# EAGLE board pocketbone (EAGLE 7.4.0)
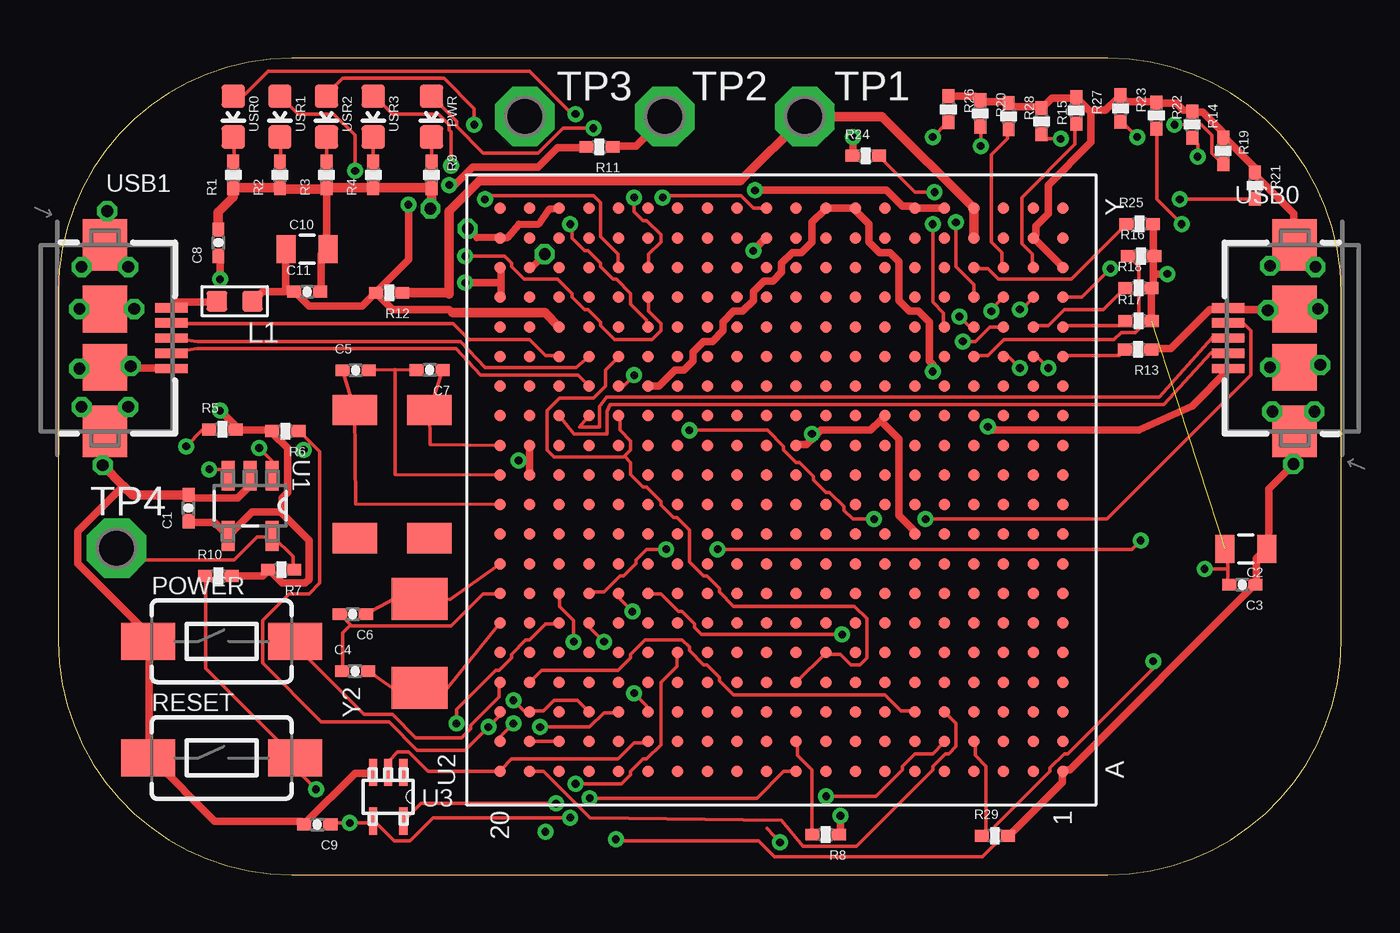
[diagram p0: board, top side]
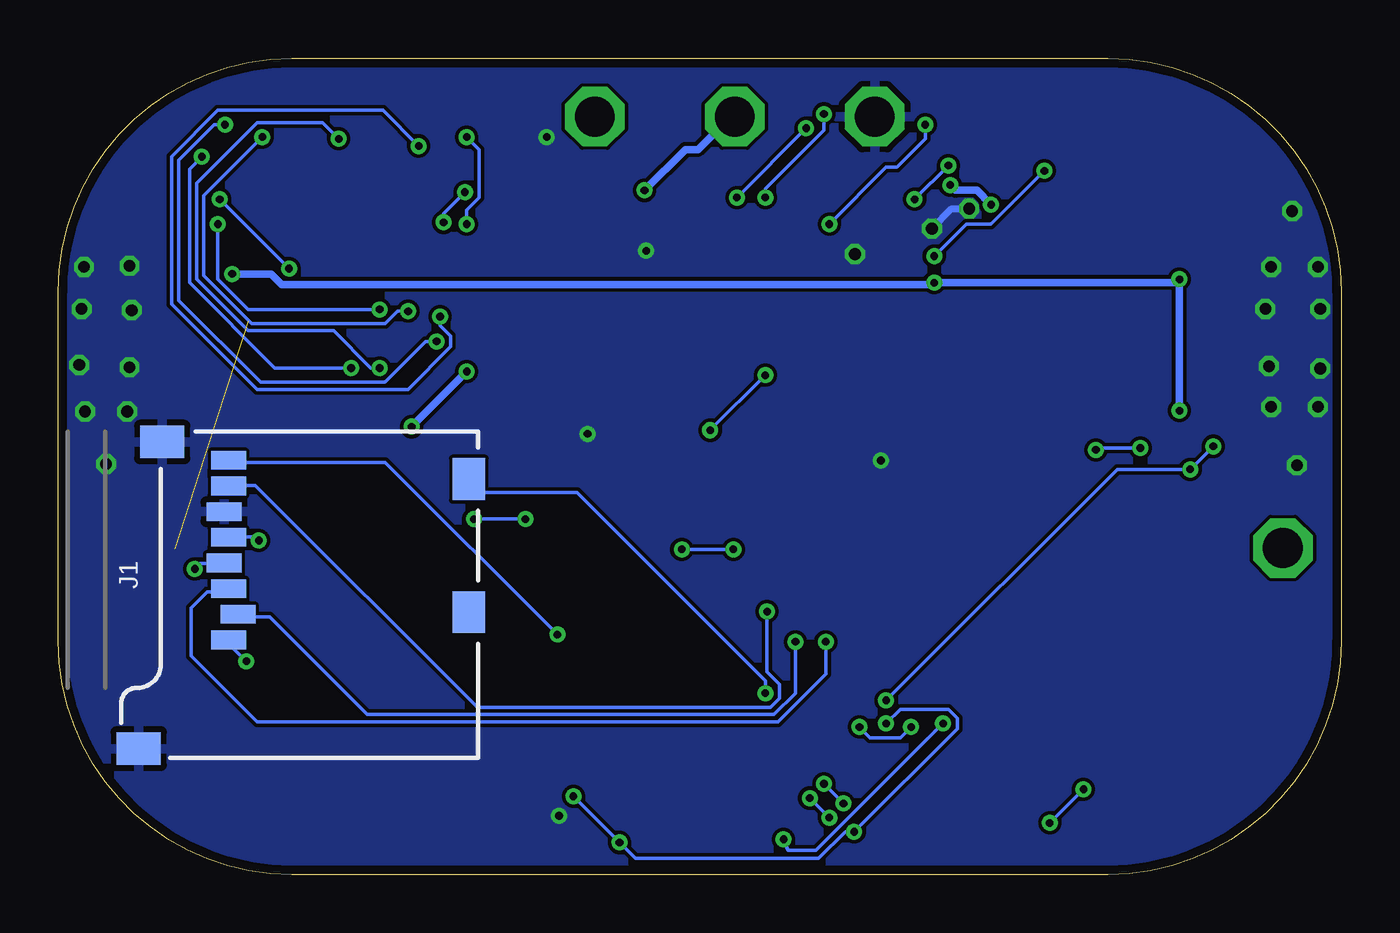
[diagram p1: board, bottom side, seen from below]

Size 55 x 35 mm. Coordinates in mm from the lower left corner, seen from the top.
Outline: 45,35 10,35 arc90 0,25 0,10 arc90 10,0 45,0 arc90 55,10 55,25 arc90 45,35
Copper layers (1*16): Top 0.0356mm / dielectric 1.5011mm / Bottom 0.0356mm
Design rules "default": minimum track width 6mil, minimum drill 13mil, track to track 6mil, track to pad 6mil, pad to pad 6mil, via to via 6mil, smd to smd 6mil, copper to edge 15mil, drill to drill 6mil, minimum pad ring 7mil, minimum via ring 7mil, stop-mask expansion 3mil, vias tented up to drill 15mil, thermal gap 10mil
Net classes: 0 default: width 0.152 mm, drill 0.33 mm, clearance 0.152 mm; 1 ground: width 0.33 mm, drill 0.33 mm, clearance 0.152 mm; 2 usb: width 0.152 mm, clearance 0.152 mm; 3 power: width 0.33 mm, drill 0.33 mm, clearance 0.152 mm

## Footprints (pad centres in the part's own frame; a part is rotated, then mirrored left to right if it is on the bottom)
0402-CAP = smd 0.61 x 0.508: 1 -0.559,0; 2 0.559,0
0805 = smd 0.8 x 1.2: 1 -0.9,0; 2 0.9,0
MICRO-SD-SOCKET-PP = smd 1.8 x 1.4: CD1 -2.05,0.4; CD2 -7.75,0.4 | smd 0.8 x 1.5: CD/DAT3 -7.84,10.3; CLK -4.54,10.7; CMD -6.74,10.7; DAT0 -2.34,10.7; DAT1 -1.24,10.7; DAT2 -8.94,10.7; GND -3.44,10.9; VCC -5.64,10.9 | smd 1.4 x 1.9: GND1 -13.6,14.55; GND3 -0.45,13.55
L0603 = smd 0.889 x 0.889: 1 -0.762,0; 2 0.762,0
TACTILE-SWITCH-1101NE = smd 2.3 x 1.6: 1 -3.15,0; 2 3.15,0
LED-0603 = smd 1 x 1: A 0,-0.877; C 0,0.877
0402-RES = smd 0.61 x 0.508: 1 -0.559,0; 2 0.559,0
P1-17 = drill 1.702 pad 2.54 octagon: TP 0,0
SOT95P290X145-5N = smd 1.27 x 0.559: 1 -1.295,0.94; 2 -1.295,0; 3 -1.295,-0.94; 4 1.295,-0.94; 5 1.295,0.94
OSD3358 = smd 0.5 x 0.5: A1 -12.065,-12.065; A2 -12.065,-10.795; A3 -12.065,-9.525; A4 -12.065,-8.255; A5 -12.065,-6.985; A6 -12.065,-5.715; A7 -12.065,-4.445; A8 -12.065,-3.175; A9 -12.065,-1.905; A10 -12.065,-0.635; A11 -12.065,0.635; A12 -12.065,1.905; A13 -12.065,3.175; A14 -12.065,4.445; A15 -12.065,5.715; A16 -12.065,6.985; A17 -12.065,8.255; A18 -12.065,9.525; A19 -12.065,10.795; A20 -12.065,12.065; B1 -10.795,-12.065; B2 -10.795,-10.795; B3 -10.795,-9.525; B4 -10.795,-8.255; B5 -10.795,-6.985; B6 -10.795,-5.715; B7 -10.795,-4.445; B8 -10.795,-3.175; B9 -10.795,-1.905; B10 -10.795,-0.635; B11 -10.795,0.635; B12 -10.795,1.905; B13 -10.795,3.175; B14 -10.795,4.445; B15 -10.795,5.715; B16 -10.795,6.985; B17 -10.795,8.255; B18 -10.795,9.525; B19 -10.795,10.795; B20 -10.795,12.065; C1 -9.525,-12.065; C2 -9.525,-10.795; C3 -9.525,-9.525; C4 -9.525,-8.255; C5 -9.525,-6.985; C6 -9.525,-5.715; C7 -9.525,-4.445; C8 -9.525,-3.175; C9 -9.525,-1.905; C10 -9.525,-0.635; C11 -9.525,0.635; C12 -9.525,1.905; C13 -9.525,3.175; C14 -9.525,4.445; C15 -9.525,5.715; C16 -9.525,6.985; C17 -9.525,8.255; C18 -9.525,9.525; C19 -9.525,10.795; C20 -9.525,12.065; D1 -8.255,-12.065; D2 -8.255,-10.795; D3 -8.255,-9.525; D4 -8.255,-8.255; D5 -8.255,-6.985; D6 -8.255,-5.715; D7 -8.255,-4.445; D8 -8.255,-3.175; D9 -8.255,-1.905; D10 -8.255,-0.635; D11 -8.255,0.635; D12 -8.255,1.905; D13 -8.255,3.175; D14 -8.255,4.445; D15 -8.255,5.715; D16 -8.255,6.985; D17 -8.255,8.255; D18 -8.255,9.525; D19 -8.255,10.795; D20 -8.255,12.065; E1 -6.985,-12.065; E2 -6.985,-10.795; E3 -6.985,-9.525; E4 -6.985,-8.255; E5 -6.985,-6.985; E6 -6.985,-5.715; E7 -6.985,-4.445; E8 -6.985,-3.175; E9 -6.985,-1.905; E10 -6.985,-0.635; E11 -6.985,0.635; E12 -6.985,1.905; E13 -6.985,3.175; E14 -6.985,4.445; E15 -6.985,5.715; E16 -6.985,6.985; E17 -6.985,8.255; E18 -6.985,9.525; E19 -6.985,10.795; E20 -6.985,12.065; F1 -5.715,-12.065; F2 -5.715,-10.795; F3 -5.715,-9.525; F4 -5.715,-8.255; F5 -5.715,-6.985; F6 -5.715,-5.715; F7 -5.715,-4.445; F8 -5.715,-3.175; F9 -5.715,-1.905; F10 -5.715,-0.635; F11 -5.715,0.635; F12 -5.715,1.905; F13 -5.715,3.175; F14 -5.715,4.445; F15 -5.715,5.715; F16 -5.715,6.985; F17 -5.715,8.255; F18 -5.715,9.525; F19 -5.715,10.795; F20 -5.715,12.065; G1 -4.445,-12.065; G2 -4.445,-10.795; G3 -4.445,-9.525; G4 -4.445,-8.255; G5 -4.445,-6.985; G6 -4.445,-5.715; G7 -4.445,-4.445; G8 -4.445,-3.175; G9 -4.445,-1.905; G10 -4.445,-0.635; G11 -4.445,0.635; G12 -4.445,1.905; G13 -4.445,3.175; G14 -4.445,4.445; G15 -4.445,5.715; G16 -4.445,6.985; G17 -4.445,8.255; G18 -4.445,9.525; G19 -4.445,10.795; G20 -4.445,12.065; H1 -3.175,-12.065; H2 -3.175,-10.795; H3 -3.175,-9.525; H4 -3.175,-8.255; H5 -3.175,-6.985; H6 -3.175,-5.715; H7 -3.175,-4.445; H8 -3.175,-3.175; H9 -3.175,-1.905; H10 -3.175,-0.635; H11 -3.175,0.635; H12 -3.175,1.905; H13 -3.175,3.175; H14 -3.175,4.445; H15 -3.175,5.715; H16 -3.175,6.985; H17 -3.175,8.255; H18 -3.175,9.525; H19 -3.175,10.795; H20 -3.175,12.065; J1 -1.905,-12.065; J2 -1.905,-10.795; J3 -1.905,-9.525; J4 -1.905,-8.255; J5 -1.905,-6.985; J6 -1.905,-5.715; J7 -1.905,-4.445; J8 -1.905,-3.175; J9 -1.905,-1.905; J10 -1.905,-0.635; J11 -1.905,0.635; J12 -1.905,1.905; J13 -1.905,3.175; J14 -1.905,4.445; J15 -1.905,5.715; J16 -1.905,6.985; J17 -1.905,8.255; J18 -1.905,9.525; J19 -1.905,10.795; J20 -1.905,12.065; K1 -0.635,-12.065; K2 -0.635,-10.795; K3 -0.635,-9.525; K4 -0.635,-8.255; K5 -0.635,-6.985; K6 -0.635,-5.715; K7 -0.635,-4.445; K8 -0.635,-3.175; K9 -0.635,-1.905; K10 -0.635,-0.635; K11 -0.635,0.635; K12 -0.635,1.905; K13 -0.635,3.175; K14 -0.635,4.445; K15 -0.635,5.715; K16 -0.635,6.985; K17 -0.635,8.255; K18 -0.635,9.525; K19 -0.635,10.795; K20 -0.635,12.065; L1 0.635,-12.065; L2 0.635,-10.795; L3 0.635,-9.525; L4 0.635,-8.255; L5 0.635,-6.985; L6 0.635,-5.715; L7 0.635,-4.445; L8 0.635,-3.175; L9 0.635,-1.905; L10 0.635,-0.635; L11 0.635,0.635; L12 0.635,1.905; L13 0.635,3.175; L14 0.635,4.445; L15 0.635,5.715; L16 0.635,6.985; L17 0.635,8.255; L18 0.635,9.525; L19 0.635,10.795; L20 0.635,12.065; M1 1.905,-12.065; M2 1.905,-10.795; M3 1.905,-9.525; M4 1.905,-8.255; M5 1.905,-6.985; M6 1.905,-5.715; M7 1.905,-4.445; M8 1.905,-3.175; M9 1.905,-1.905; M10 1.905,-0.635; M11 1.905,0.635; M12 1.905,1.905; M13 1.905,3.175; M14 1.905,4.445; M15 1.905,5.715; M16 1.905,6.985; M17 1.905,8.255; M18 1.905,9.525; M19 1.905,10.795; M20 1.905,12.065; N1 3.175,-12.065; N2 3.175,-10.795; N3 3.175,-9.525; N4 3.175,-8.255; N5 3.175,-6.985; N6 3.175,-5.715; N7 3.175,-4.445; N8 3.175,-3.175; N9 3.175,-1.905; N10 3.175,-0.635; N11 3.175,0.635; N12 3.175,1.905; N13 3.175,3.175; N14 3.175,4.445; N15 3.175,5.715; N16 3.175,6.985; N17 3.175,8.255; N18 3.175,9.525; N19 3.175,10.795; N20 3.175,12.065; P1 4.445,-12.065; P2 4.445,-10.795; P3 4.445,-9.525; P4 4.445,-8.255; P5 4.445,-6.985; P6 4.445,-5.715; P7 4.445,-4.445; P8 4.445,-3.175; P9 4.445,-1.905; P10 4.445,-0.635; P11 4.445,0.635; P12 4.445,1.905; P13 4.445,3.175; P14 4.445,4.445; P15 4.445,5.715; P16 4.445,6.985; P17 4.445,8.255; P18 4.445,9.525; P19 4.445,10.795; P20 4.445,12.065; R1 5.715,-12.065; R2 5.715,-10.795; R3 5.715,-9.525; R4 5.715,-8.255; R5 5.715,-6.985; R6 5.715,-5.715; R7 5.715,-4.445; R8 5.715,-3.175; R9 5.715,-1.905; R10 5.715,-0.635; R11 5.715,0.635; R12 5.715,1.905; R13 5.715,3.175; R14 5.715,4.445; R15 5.715,5.715; R16 5.715,6.985; R17 5.715,8.255; R18 5.715,9.525; R19 5.715,10.795; R20 5.715,12.065; T1 6.985,-12.065; T2 6.985,-10.795; T3 6.985,-9.525; T4 6.985,-8.255; T5 6.985,-6.985; T6 6.985,-5.715; T7 6.985,-4.445; T8 6.985,-3.175; T9 6.985,-1.905; T10 6.985,-0.635; T11 6.985,0.635; T12 6.985,1.905; T13 6.985,3.175; T14 6.985,4.445; T15 6.985,5.715; T16 6.985,6.985; T17 6.985,8.255; T18 6.985,9.525; T19 6.985,10.795; T20 6.985,12.065; U1 8.255,-12.065; U2 8.255,-10.795; U3 8.255,-9.525; U4 8.255,-8.255; U5 8.255,-6.985; U6 8.255,-5.715; U7 8.255,-4.445; U8 8.255,-3.175; U9 8.255,-1.905; U10 8.255,-0.635; U11 8.255,0.635; U12 8.255,1.905; U13 8.255,3.175; U14 8.255,4.445; U15 8.255,5.715; U16 8.255,6.985; U17 8.255,8.255; U18 8.255,9.525; U19 8.255,10.795; U20 8.255,12.065; V1 9.525,-12.065; V2 9.525,-10.795; V3 9.525,-9.525; V4 9.525,-8.255; V5 9.525,-6.985; V6 9.525,-5.715; V7 9.525,-4.445; V8 9.525,-3.175; V9 9.525,-1.905; V10 9.525,-0.635; V11 9.525,0.635; V12 9.525,1.905; V13 9.525,3.175; V14 9.525,4.445; V15 9.525,5.715; V16 9.525,6.985; V17 9.525,8.255; V18 9.525,9.525; V19 9.525,10.795; V20 9.525,12.065; W1 10.795,-12.065; W2 10.795,-10.795; W3 10.795,-9.525; W4 10.795,-8.255; W5 10.795,-6.985; W6 10.795,-5.715; W7 10.795,-4.445; W8 10.795,-3.175; W9 10.795,-1.905; W10 10.795,-0.635; W11 10.795,0.635; W12 10.795,1.905; W13 10.795,3.175; W14 10.795,4.445; W15 10.795,5.715; W16 10.795,6.985; W17 10.795,8.255; W18 10.795,9.525; W19 10.795,10.795; W20 10.795,12.065; Y1 12.065,-12.065; Y2 12.065,-10.795; Y3 12.065,-9.525; Y4 12.065,-8.255; Y5 12.065,-6.985; Y6 12.065,-5.715; Y7 12.065,-4.445; Y8 12.065,-3.175; Y9 12.065,-1.905; Y10 12.065,-0.635; Y11 12.065,0.635; Y12 12.065,1.905; Y13 12.065,3.175; Y14 12.065,4.445; Y15 12.065,5.715; Y16 12.065,6.985; Y17 12.065,8.255; Y18 12.065,9.525; Y19 12.065,10.795; Y20 12.065,12.065
DCK5 = smd 1.168 x 0.356: 1 -1.041,0.65; 2 -1.041,0; 3 -1.041,-0.65; 4 1.041,-0.65; 5 1.041,0.65
USB-AB-MICRO-SMD = smd 1.4 x 0.4: D+ 2.85,0; D- 2.85,0.65; GND 2.85,-1.3; ID 2.85,-0.65; VBUS 2.85,1.3 | smd 1.9 x 2.2: SHIELD1 0,4; SHIELD4 0,-4 | smd 1.9 x 2: SHIELD2 0,1.25; SHIELD3 0,-1.25
CM200C-32.768KAZF-UT = smd 1.3 x 1.9: 1 1.27,2.54; 2 1.27,5.74; 3 6.77,2.54; 4 6.77,5.74
445C33D24M00000 = smd 1.8 x 2.4: 1 1.27,2.54; 2 5.07,2.54

## Placement (x,y rotation side)
C1  0.1uF  [0402-CAP]  5.59,15.71 90 top
C2  10uF  [0805]  50.91,13.97 180 top
C3  0.1uF  [0402-CAP]  50.76,12.43 180 top
C4  20pF  [0402-CAP]  12.72,8.72 0 top
C5  20pF  [0402-CAP]  12.75,21.62 0 top
C6  20pF  [0402-CAP]  12.63,11.17 180 top
C7  20pF  [0402-CAP]  15.92,21.64 180 top
C8  0.1uF  [0402-CAP]  6.87,27.09 90 top
C9  1uF  [0402-CAP]  11.1,2.15 180 top
C10  10uF  [0805]  10.67,26.82 0 top
C11  0.1uF  [0402-CAP]  10.67,24.99 0 top
J1  USD_CONNECTOR  [MICRO-SD-SOCKET-PP]  37,19 90 bottom
L1  120  [L0603]  7.56,24.59 180 top
POWER  SWITCH-MOMENTARY-2SMD-1101NE  [TACTILE-SWITCH-1101NE]  7,10 0 top
PWR  BLUE  [LED-0603]  16,32.5 180 top
R1  240  [0402-RES]  7.5,30 90 top
R2  240  [0402-RES]  9.5,30 90 top
R3  240  [0402-RES]  11.5,30 90 top
R4  240  [0402-RES]  13.5,30 90 top
R5  1.5K,1%  [0402-RES]  7.03,19.09 0 top
R6  1.5K,1%  [0402-RES]  9.73,19.01 180 top
R7  1.5K,1%  [0402-RES]  9.55,13.07 180 top
R8  4.87k  [0402-RES]  32.9,1.72 180 top
R9  4.87k  [0402-RES]  16,30 270 top
R10  10K,1%  [0402-RES]  6.86,12.8 0 top
R11  0  [0402-RES]  23.2,31.2 180 top
R12  0,DNI  [0402-RES]  14.18,24.95 180 top
R13  100K,1%  [0402-RES]  46.29,22.51 180 top
R14  100K,1%  [0402-RES]  48.61,32.15 270 top
R15  100K,1%  [0402-RES]  42.15,32.3 270 top
R16  100K,1%  [0402-RES]  46.42,26.52 0 top
R17  100K,1%  [0402-RES]  46.31,23.74 0 top
R18  100K,1%  [0402-RES]  46.31,25.15 0 top
R19  100K,1%  [0402-RES]  49.94,31.03 270 top
R20  100K,1%  [0402-RES]  39.53,32.64 270 top
R21  100K,1%  [0402-RES]  51.3,29.54 270 top
R22  100K,1%  [0402-RES]  47.08,32.54 270 top
R23  100K,1%  [0402-RES]  45.54,32.85 270 top
R24  100K,1%  [0402-RES]  34.62,30.82 0 top
R25  100K,1%  [0402-RES]  46.36,27.89 0 top
R26  100K,1%  [0402-RES]  38.16,32.82 270 top
R27  100K,1%  [0402-RES]  43.64,32.76 270 top
R28  100K,1%  [0402-RES]  40.74,32.51 270 top
R29  10K,1%  [0402-RES]  40.15,1.66 0 top
RESET  SWITCH-MOMENTARY-2SMD-1101NE  [TACTILE-SWITCH-1101NE]  7,5 0 top
TP1  TPSQPAD1-17  [P1-17]  32,32.5 0 top
TP2  TPSQPAD1-17  [P1-17]  26,32.5 0 top
TP3  TPSQPAD1-17  [P1-17]  20,32.5 0 top
TP4  TPSQPAD1-17  [P1-17]  2.5,14 0 top
U1  24LC_32AT-I/OT  [SOT95P290X145-5N]  8.22,15.81 270 top
U2  OSD3358  [OSD3358]  31,16.5 90 top
U3  SN74LVC1G07_DCK_5  [DCK5]  14.14,3.34 270 top
USB0  USB-MICRO-SMD  [USB-AB-MICRO-SMD]  53,23 180 top
USB1  USB-MICRO-SMD  [USB-AB-MICRO-SMD]  2,23 0 top
USR0  BLUE  [LED-0603]  7.5,32.5 180 top
USR1  BLUE  [LED-0603]  9.5,32.5 180 top
USR2  BLUE  [LED-0603]  11.5,32.5 180 top
USR3  BLUE  [LED-0603]  13.5,32.5 180 top
Y1  CM200C-32.768KAZF-UT  [CM200C-32.768KAZF-UT]  10.17,21.19 270 top
Y2  445C33D24M00000  [445C33D24M00000]  18.03,6.74 90 top

## Library data of the parts
C1-C11 R1-R29 = Strawson_Eagle_Lib
J1 = pocketbone; PROD_ID: CONN-07820
L1 = Seeed-OPL-Inductor
POWER RESET = SparkFun-Electromechanical; PROD_ID: SWCH-00815
PWR USR0 USR1-USR3 = BeagleBone_Blue
TP1 = pocketbone; TP_SIGNAL_NAME: SYS_5V
TP2 = pocketbone; TP_SIGNAL_NAME: 5.0V
TP3 = pocketbone; TP_SIGNAL_NAME: GND
TP4 = pocketbone; TP_SIGNAL_NAME: WP
U1 = pocketbone; MPN: 24LC32AT-I/OT; OC_FARNELL: 1700993; OC_NEWARK: 08P0113; PACKAGE: SOT-23-5; SUPPLIER: MICROCHIP
U2 USB0 USB1 Y1 Y2 = pocketbone
U3 = pocketbone; DATASHEETURL: http://www.ti.com/lit/gpn/SN74LVC1G07; DESCRIPTION: Single Buffer/Driver With Open-Drain Output; FAMILY_NAME: LL BUFFER AND DRIVER WITH OPEN-DRAIN OUTPUT; GENERIC_PART_NUMBER: SN74LVC1G07; INDUSTRY_STD_PKG_TYPE: SC70; MANUFACTURER: Texas Instruments; MANUFACTURER_PART_NUMBER: sn74lvc1g07_dck_5; PACKAGE_DESIGNATOR: DCK; PIN_COUNT: 5; VENDOR: Texas Instruments

## Nets
3.3V [power]: C1.1 C2.2 C3.2 C8.1 J1.VCC R5.2 R6.2 R7.2 R10.2 R16.2 R17.2 R18.2 R25.2 U1.4 U2.U20 U2.V20
5.0V [power]: R11.1 TP2.TP U2.Y5 U2.Y6
BATT_LED_2: R26.2 U2.T5
EQEP_1A: R27.2 U2.V2
EQEP_1B: R28.2 U2.V3
GND [ground]: C1.2 C2.1 C3.1 C8.2 C9.2 C10.2 C11.2 J1.GND J1.GND1 J1.GND3 POWER.1 R1.1 R2.1 R3.1 R4.1 R8.1 R9.2 R13.1 R14.1 R15.1 R19.1 R20.1 R21.1 R22.1 R23.1 R24.1 R26.1 R27.1 R28.1 R29.2 RESET.1 TP3.TP U1.2 U2.A1 U2.J6 U2.L19 U2.M10 U2.M19 U2.N7 U2.V1 U2.V19 U2.W2 U2.W11 U2.W20 U2.Y18 U3.3 USB0.GND USB0.SHIELD1 USB0.SHIELD2 USB0.SHIELD3 USB0.SHIELD4 USB1.GND USB1.SHIELD1 USB1.SHIELD2 USB1.SHIELD3 USB1.SHIELD4
I2C0_SCL: R6.1 U1.1 U2.C16 U2.C20
I2C0_SDA: R5.1 U1.3 U2.C17 U2.C19
LCD_DATA_14: R25.1 U2.V4
LDO_PGOOD: U2.B5 U2.B20
MDIR_2B: R24.2 U2.U4
MDIR_3A: R16.1 U2.R4
MDIR_3B: R15.2 U2.R3
MDIR_4A: R13.2 U2.R1
MDIR_4B: R14.2 U2.R2
N$1 [power]: L1.2 USB1.VBUS
N$2: J1.CLK U2.G17
N$5: J1.CD/DAT3 U2.F17
N$12: U2.C6 U2.D19
N$26: C7.1 U2.M20 Y1.2
N$27: C5.1 U2.K20 Y1.1
N$28: R7.1 TP4.TP U1.5
N$31: C5.2 C7.2 U2.L20
N$32: C6.1 U2.H20 Y2.2
N$33: C4.2 U2.F20 Y2.1
N$34: C4.1 C6.2 U2.G20
N$42: R8.2 U2.B10
N$43: U2.V16 USR3.A
N$44: U2.T15 USR2.A
N$45: U2.U15 USR1.A
N$46: U2.V15 USR0.A
N$47: R1.2 USR0.C
N$57: R2.2 USR1.C
N$58: R3.2 USR2.C
N$59: R4.2 USR3.C
N$70: J1.DAT1 U2.G15
N$74: J1.CMD U2.G18
N$75: J1.CD1 U2.C15
N$77: J1.DAT0 U2.G16
N$129 [power]: C10.1 C11.1 L1.1 R11.2 R12.2 U2.T18
N$131: R29.1 U2.B4
NTE: J1.DAT2 U2.F18
PMIC_INT: U2.B18 U2.B19
PMIC_NWAKEUP: U2.A19 U2.C5
PMIC_PGOOD: U2.A20 U2.B15 U3.2
PWR: POWER.2 U2.D20
PWR_LEDR: PWR.C R9.1
RESET: C9.1 R10.1 RESET.2 U2.A10 U3.4
SERVO_EN: R23.2 U2.U3
SVO5: R19.2 U2.T3
SVO6: R20.2 U2.T4
SVO7: R17.1 U2.T1
SVO8: R18.1 U2.T2
SYS_5V [power]: R12.1 TP1.TP U2.W4 U2.Y4
UART5_RX: R22.2 U2.U2
UART5_TX: R21.2 U2.U1
USB0_DM [usb]: U2.N18 USB0.D-
USB0_DP [usb]: U2.N17 USB0.D+
USB0_ID: U2.P16 USB0.ID
USB1_DM [usb]: U2.R18 USB1.D-
USB1_DP [usb]: U2.R17 USB1.D+
USB1_ID: U2.P17 USB1.ID
USB_DC [power]: U2.P15 U2.Y8 U2.Y9 USB0.VBUS
VDD_1V8: U2.D10 U2.E9 U2.N16 U2.R16
VDD_3V3AUX: PWR.A U2.Y11
VDD_RTC: U2.E14 U3.5
VIN_BAT_0: U2.Y2
VIN_BAT_1: U2.Y3

## Tracks (layer width: path | path; a pad name or v marks a point on that pad's centre or on a via)
3.3V  (via drill 0.33)  (1 unrouted)
  Top 0.152: 50.14,13.11 50.14,13.87 50.06,13.95 C2.2 | 50.14,13.11 50.14,12.5 C3.2 | 50.14,13.11 v49.15,13.11
  Top 0.33: R10.2 8.76,12.8 8.99,13.03 R7.2 9.14,12.95 9.6,12.5 10.59,12.5 10.74,12.65 10.74,14.33 9.53,15.54 | C1.1 5.64,15.09 6.71,15.09 7.24,14.55 U1.4 7.39,14.63 8.31,15.54 9.53,15.54 | 9.53,15.54 9.6,15.7 9.6,16.15 9.83,16.38 9.83,18.29 9.22,18.9 R6.2 9.14,19.05 7.62,19.05 R5.2 7.62,19.2 v6.93,19.89 | 46.94,25.76 46.94,26.52 R16.2 46.94,26.67 46.94,27.89 R25.2 | 46.94,25.76 46.94,25.22 R18.2 46.86,24.99 46.86,23.77 R17.2 | 18.97,25.38 18.97,25.98 U2.V20 | 18.97,25.38 18.97,24.77 U2.U20 | v6.93,25.53 6.93,26.52 C8.1 | v17.45,25.38 18.97,25.38 | v47.55,25.76 46.94,25.76
  Bottom 0.152: v49.15,13.11 48.92,13.34 47.93,13.34 J1.VCC
  Bottom 0.33: v6.93,19.89 v6.93,25.53 7.09,25.38 v17.45,25.38 17.6,25.3 45.41,25.3 45.87,25.76 v47.55,25.76
5.0V  (via drill 0.33)
  Top 0.33: U2.Y5 37.95,28.57 36.73,28.57 U2.Y6 36.58,28.65 36.2,28.65 35.51,29.34 v29.87,29.34 | R11.1 23.77,31.24 24.77,31.24 25.98,32.46 TP2.TP
  Bottom 0.33: v29.87,29.34 28.12,31.09 27.58,31.09 26.21,32.46 26.06,32.46 TP2.TP
BATT_LED_2  (via drill 0.33)
  Top 0.152: v37.49,27.89 37.49,24.54 37.95,24.08 37.95,23.55 U2.T5 | v37.49,31.62 38.1,32.23 R26.2
  Bottom 0.152: v37.49,27.89 37.49,28.5 36.96,29.03 36.96,31.09 v37.49,31.62
EQEP_1A
  Top 0.152: U2.V2 41.76,26.06 41.76,26.59 41.3,27.05 41.3,29.03 43.59,31.32 43.59,32.16 R27.2
EQEP_1B
  Top 0.152: U2.V3 40.46,26.06 40.46,26.67 40.01,27.13 40.01,30.86 40.69,31.55 40.69,31.93 R28.2
GND  (via drill 0.33, 0.5)
  Top 0.152: R2.1 9.53,29.44 | R3.1 | 13.49,29.44 R4.1 | 21.45,28.55 U2.Y18 | U2.W20 18.9,27.3 | v15.95,28.55 16,28.6 | 20.3,26.05 20.25,26.05 U2.V19
  Top 0.305: 21.45,28.55 21.05,28.55 20.6,27.9 19.75,27.9 19.25,27.3 U2.W20 | v17.55,27.7 17.95,27.3 18.9,27.3 | v20.85,26.6 20.3,26.05
  Top 0.33: U3.3 13.49,4.34 12.72,4.34 10.59,2.21 C9.2 10.44,2.29 6.71,2.29 4.04,4.95 RESET.1 3.89,5.03 3.89,9.98 POWER.1 3.73,10.13 3.73,10.44 0.84,13.34 0.84,14.71 2.79,16.66 | 32.42,18.78 32.69,19.05 34.82,19.05 35.24,19.47 | 32.42,18.78 32.08,18.44 31.7,18.44 U2.M10 | 35.24,19.47 35.43,19.66 U2.N7 | 35.24,19.47 36.04,18.67 36.04,15.39 36.65,14.78 36.65,14.63 U2.J6 | R13.1 46.86,22.55 47.7,22.55 49.38,24.23 50.14,24.23 USB0.GND 50.29,24.23 51.51,24.23 51.77,24.17 v51.85,24.2 | R29.2 40.77,1.68 43.05,3.96 43.05,4.42 U2.A1 43.2,4.5 43.36,4.5 51.21,12.34 C3.1 51.36,12.5 51.36,13.56 51.74,13.95 C2.1 51.89,14.1 51.89,16.54 52.88,17.53 v52.95,17.6 | C11.2 11.28,24.99 11.28,26.59 11.51,26.82 C10.2 11.51,26.98 11.51,29.26 R3.1 11.51,29.41 R3.1 | 20.19,17.75 20.19,18.36 U2.M19 | 20.19,17.75 U2.L19 | v29.79,26.75 30.33,27.28 U2.W11 | v33.53,2.52 33.53,1.75 R8.1 | R2.1 9.53,29.41 9.53,29.44 | R4.1 13.49,29.41 13.49,29.44 | v34.06,31.62 34.06,30.86 R24.1 | v19.74,17.75 20.19,17.75 | U1.2 8.15,17.07 8.15,16.61 7.7,16.15 5.71,16.15 5.64,16.23 C1.2 | USB0.SHIELD2 52.96,21.79 52.5,21.79 52.15,21.75 v51.95,21.75 | USB0.SHIELD1 53.03,19.05 53.8,19.81 v53.85,19.85 | v32.31,18.9 32.42,18.78 | USB1.GND 4.8,21.72 3.2,21.72 3.12,21.79 v3.1,21.8 2.97,21.79 2.06,21.79 USB1.SHIELD3 | USB1.SHIELD2 1.98,24.23 0.91,24.23 v0.9,24.25 | USB0.SHIELD3 53.03,24.23 53.95,24.23 v54,24.25 | U2.V1 43.05,26.06 41.83,27.28 U2.W2 41.91,27.43 41.91,27.81 42.44,28.35 42.44,29.57 44.27,31.39 44.27,32.69 | R26.1 38.18,33.38 39.32,33.38 39.4,33.3 R20.1 39.55,33.15 40.69,33.15 R28.1 40.77,32.92 42.14,32.92 R15.1 42.29,32.99 42.6,33.3 43.59,33.3 R27.1 43.74,33.22 44.27,32.69
  Top 0.33: v53.9,26.05 53.95,26.06 53.03,26.98 USB0.SHIELD4 52.96,27.13 52.96,28.35 51.36,29.95 R21.1 51.28,30.1 51.28,30.33 50.06,31.55 R19.1 49.91,31.62 49.91,31.85 49.07,32.69 48.77,32.69 R14.1 48.54,32.77 48.23,32.77 47.93,33.07 47.24,33.07 R22.1 47.02,33.15 45.8,33.15 45.57,33.38 R23.1 45.41,33.3 44.88,32.77 44.42,32.77 44.27,32.69
  Top 0.406: C1.2 3.18,16.27 2.79,16.66 v1.9,17.55 1.95,17.6 1.95,17.95 2,18 USB1.SHIELD4 | v2.1,28.45 2.1,28.1 2,28 USB1.SHIELD1 | C8.2 6.85,27.7 6.85,28.4 7.5,29.05 R1.1 7.7,29.45 9.35,29.45 R2.1 9.7,29.4 11.35,29.4 R3.1 11.7,29.45 13.35,29.45 R4.1 13.7,29.45 R9.2 16,28.65 v15.95,28.55
  Bottom 0.305: v15.95,28.55 16.7,28.55 v17.55,27.7
  other vias: 3,26.05 1,26.05 1,20.05 3,20.05 3.25,24.25 51.95,26.1 52.05,19.85 54.1,21.85 0.9,21.7
  pour Bottom: 10,0 5,0 0,5 0,30 5,35 50,35 55,30 55,5 50,0
I2C0_SCL  (via drill 0.33)
  Top 0.152: 10.82,18.52 10.36,18.97 R6.1 | 10.82,18.52 11.2,18.14 11.2,12.5 10.74,12.04 9.91,12.04 8.76,10.9 8.76,9.07 11.28,6.55 14.17,6.55 15.39,5.33 17.45,5.33 v18.44,6.33 18.9,6.78 18.9,6.93 U2.C20 | v20.65,6.33 22.78,6.33 23.39,6.93 24,6.93 U2.C16 | v8.61,18.29 9.14,17.75 9.14,17.14 U1.1 | 10.82,18.52 v10.52,18.21
  Bottom 0.152: v20.65,6.33 20.19,5.87 18.9,5.87 v18.44,6.33 | v8.61,18.29 10.44,18.29 v10.52,18.21
I2C0_SDA  (via drill 0.33)
  Top 0.152: U2.C17 22.71,7.01 22.25,7.47 21.26,7.47 20.8,7.01 20.27,7.01 U2.C19 20.19,7.01 19.96,7.01 v19.51,7.47 | v5.49,18.36 6.17,19.05 6.4,19.05 R5.1 | v6.48,17.37 7.01,17.37 7.24,17.14 U1.3
  Bottom 0.152: v5.49,18.36 v6.48,17.37 9.6,17.37 v19.51,7.47
LCD_DATA_14
  Top 0.152: U2.V4 39.32,25.98 39.85,25.98 40.31,25.53 43.43,25.53 R25.1
LDO_PGOOD  (via drill 0.33)
  Top 0.152: v19.51,6.48 18.97,5.94 18.97,5.71 U2.B20 | v30.94,1.37 30.38,1.98 | v32.92,3.35 35.05,3.35 36.2,4.5 36.2,4.65 36.73,5.18 37.49,5.18 37.95,5.64 U2.B5
  Bottom 0.152: v19.51,6.48 18.9,7.09 16.84,7.09 16.46,6.71 16.46,6.25 v20.88,1.83 21.26,1.83 22.4,0.69 30.25,0.69 v30.94,1.37 v32.92,3.35
MDIR_2B  (via drill 0.33)
  Top 0.152: v38.48,27.96 38.48,26.06 39.24,25.3 39.24,24.77 U2.U4 | v37.57,29.26 36.73,29.26 35.2,30.79 R24.2
  Bottom 0.152: v38.48,27.96 38.48,28.35 v37.57,29.26
MDIR_3A
  Top 0.152: U2.R4 39.32,22.25 39.85,22.25 40.54,22.94 45.26,22.94 45.57,23.24 46.18,23.24 46.33,23.39 46.33,26.06 45.87,26.52 R16.1
MDIR_3B  (via drill 0.33)
  Top 0.152: v41.22,21.72 40.77,22.17 40.54,22.17 U2.R3 | v42.98,31.55 42.37,31.55 42.22,31.7 R15.2
  Bottom 0.152: v41.22,21.72 41.6,21.72 43.2,23.32 46.86,23.32 49.07,25.53 49.07,29.64 46.48,32.23 43.66,32.23 v42.98,31.55
MDIR_4A
  Top 0.152: U2.R1 43.13,22.25 45.49,22.25 45.72,22.48 R13.2
MDIR_4B  (via drill 0.33)
  Top 0.152: v42.44,21.72 41.99,22.17 41.83,22.17 U2.R2 | v48.84,30.79 48.84,31.32 48.62,31.55 R14.2
  Bottom 0.152: v42.44,21.72 45.72,21.72 49.38,25.38 49.38,30.25 v48.84,30.79
N$1
  Top 0.33: L1.2 6.78,24.54 5.11,24.54 4.88,24.31 USB1.VBUS
N$2  (via drill 0.33)
  Top 0.152: v26.06,13.95 25.22,13.95 24.77,13.49 24.77,13.34 24.23,12.8 24.08,12.8 23.39,12.12 22.78,12.12 U2.G17 | v28.27,13.95 46.02,13.95 v46.41,14.33
  Bottom 0.152: v28.27,13.95 v26.06,13.95 | v46.41,14.33 46.56,14.48 47.62,14.48 J1.CLK
N$5  (via drill 0.33)
  Top 0.152: v23.39,9.98 22.78,10.59 22.78,10.74 U2.F17
  Bottom 0.152: v23.39,9.98 23.39,7.77 24.31,6.86 41.76,6.86 45.95,11.05 47.17,11.05 47.24,11.12 J1.CD/DAT3
N$12
  Top 0.152: U2.C6 36.65,7.01 36.12,7.01 35.43,7.7 28.96,7.7 28.35,8.31 28.35,8.46 27.81,8.99 27.66,8.99 27.05,9.6 27.05,9.75 26.75,10.06 25.15,10.06 24.54,9.45 24.54,9.3 24,8.76 20.73,8.76 20.27,8.31 U2.D19
N$26
  Top 0.152: U2.M20 15.95,18.45 Y1.2 C7.1
N$27
  Top 0.152: U2.K20 12.75,15.9 Y1.1 C5.1
N$28
  Top 0.152: R7.1 10.06,13.11 10.06,13.64 9.22,14.48 U1.5 9.14,14.48 8.53,14.48 7.54,13.49 2.97,13.49 2.52,13.95 TP4.TP
N$31
  Top 0.152: U2.L20 14.45,17.15 14.45,21.65 C7.2 13.55,21.65 C5.2
N$32
  Top 0.152: U2.H20 16.8,11.8 Y2.2 14.35,11.8 C6.1
N$33
  Top 0.152: U2.F20 16.7,8 Y2.1 14.3,8 C4.2
N$34
  Top 0.152: 12.54,10.71 12.12,11.12 C6.2 | 12.54,10.71 12.57,10.67 16.84,10.67 18.21,12.04 18.9,12.04 U2.G20 | 12.54,10.71 12.19,10.36 12.19,8.76 C4.1
N$42
  Top 0.152: U2.B10 31.7,5.64 31.7,5.11 32.31,4.5 32.31,1.75 R8.2
N$43  (via drill 0.33)
  Top 0.152: v18.29,28.96 18.44,29.11 22.94,29.11 23.24,28.8 23.24,27.36 24,26.59 24,26.06 U2.V16 | v16.84,30.4 16.84,31.85 16.76,31.93 16.76,32.16 16.31,32.61 14.33,32.61 13.56,33.38 USR3.A
  Bottom 0.152: v16.84,30.4 v18.29,28.96
N$44  (via drill 0.33)
  Top 0.152: v21.95,27.89 22.02,27.81 22.02,27.28 22.55,26.75 22.71,26.75 23.24,26.21 23.24,26.06 23.77,25.53 23.93,25.53 24.54,24.92 24.54,24.46 25.22,23.77 25.22,23.55 U2.T15 | v17.83,32.16 17.83,32.84 16.54,34.14 12.19,34.14 11.51,33.45 USR2.A
  Bottom 0.152: v21.95,27.89 19.51,30.33 19.05,30.33 17.83,31.55 v17.83,32.16
N$45  (via drill 0.33)
  Top 0.152: v17.45,26.52 19.13,26.52 19.43,26.21 19.43,26.06 19.96,25.53 21.41,25.53 22.02,24.92 22.02,24.77 22.55,24.23 22.71,24.23 23.24,23.7 23.24,23.55 23.85,22.94 25.45,22.94 25.83,23.32 25.83,23.62 25.3,24.16 25.3,24.69 U2.U15 | v12.72,30.18 12.72,31.7 11.81,32.61 10.29,32.61 9.53,33.38 USR1.A
  Bottom 0.152: v17.45,26.52 16.08,27.89 15.01,27.89 v12.72,30.18
N$46  (via drill 0.33)
  Top 0.152: v24.69,29.03 24.69,28.42 25.07,28.04 25.22,28.04 25.83,27.43 25.83,27.13 25.3,26.59 25.3,26.06 U2.V15 | v22.17,32.61 22.02,32.61 20.19,34.44 8.99,34.44 8,33.45 7.54,33.45 USR0.A
  Bottom 0.152: v24.69,29.03 24.69,29.41 22.17,31.93 v22.17,32.61
N$47
  Top 0.152: R1.2 7.54,30.63 7.54,31.62 USR0.C
N$57
  Top 0.152: R2.2 9.53,30.63 9.53,31.62 USR1.C
N$58
  Top 0.152: R3.2 11.51,30.63 USR2.C
N$59
  Top 0.152: R4.2 13.49,30.63 13.49,31.62 USR3.C
N$70  (via drill 0.33)
  Top 0.152: v33.6,10.29 27.58,10.29 27.28,10.59 27.28,10.74 26.75,11.28 26.59,11.28 25.83,12.04 U2.G15
  Bottom 0.152: v33.6,10.29 41,17.68 47.55,17.68 47.62,17.75 J1.DAT1
N$74  (via drill 0.33)
  Top 0.152: v22.1,9.98 22.1,10.9 21.49,11.51 U2.G18
  Bottom 0.152: v22.1,9.98 22.1,8.61 24.16,6.55 46.48,6.55 49.3,9.37 49.3,11.43 48.62,12.12 47.78,12.12 47.7,12.19 J1.CMD
N$75  (via drill 0.33)
  Top 0.152: v24.69,7.77 25.22,7.24 25.22,7.01 U2.C15
  Bottom 0.152: v24.69,7.77 24.69,8.31 32.77,16.38 36.8,16.38 37.34,16.92 J1.CD1
N$77  (via drill 0.33)
  Top 0.152: v24.61,11.28 24.08,11.81 24.08,12.04 U2.G16
  Bottom 0.152: v24.61,11.28 24.61,8.69 24.08,8.15 24.08,7.54 24.46,7.16 37.03,7.16 46.56,16.69 47.62,16.69 J1.DAT0
N$129  (via drill 0.33)
  Top 0.33: 9.75,24.99 8.76,24.99 8.38,24.61 L1.1 | 9.75,24.99 C11.1 10.21,24.92 10.74,24.38 13.03,24.38 13.49,24.84 R12.2 | 9.75,24.99 9.75,26.82 C10.1 | R12.2 13.64,24.92 14.33,24.23 16.76,24.23 16.9,24.1 | v16.76,29.57 16.99,29.57 17.75,30.33 20.57,30.33 21.41,31.17 22.63,31.17 R11.2 | v15.01,28.73 15.01,26.36 13.72,25.07 R12.2
  Top 0.406: U2.T18 20.86,24.1 16.9,24.1
  Bottom 0.33: v16.76,29.57 16.54,29.34 15.62,29.34 v15.01,28.73
N$131
  Top 0.152: U2.B4 39.32,5.64 39.32,5.11 39.78,4.65 39.78,1.83 39.62,1.68 R29.1
NTE  (via drill 0.33)
  Top 0.152: v17.07,6.48 17.07,7.09 18.75,8.76 18.9,8.76 19.43,9.3 19.43,9.45 20.04,10.06 20.19,10.06 20.88,10.74 21.41,10.74 U2.F18 | v46.94,9.14 46.94,8.84 43.28,5.18 43.13,5.18 42.52,4.57 42.52,4.42 40.16,2.06 40.16,1.29 39.62,0.76 30.71,0.76 30.02,1.45 23.93,1.45 v23.9,1.51
  Bottom 0.152: v17.07,6.48 22.51,1.03 23.72,1.03 v23.9,1.51 | v46.94,9.14 47.62,9.83 47.62,10.06 J1.DAT2
PMIC_INT
  Top 0.152: U2.B19 20.27,5.71 21.41,5.71 U2.B18
PMIC_NWAKEUP
  Top 0.152: U2.A19 20.27,4.42 20.8,4.42 22.79,2.43 31.01,2.33 31.93,1.22 34.21,1.22 37.49,4.5 37.49,4.65 38.02,5.18 38.18,5.18 38.48,5.49 38.48,6.48 38.02,6.93 U2.C5
PMIC_PGOOD
  Top 0.152: U3.2 14.17,4.42 14.17,4.88 14.55,5.26 15.01,5.26 15.85,4.42 18.9,4.42 U2.A20 18.97,4.5 19.43,4.95 24,4.95 24.69,5.64 25.22,5.64 U2.B15
PWR
  Top 0.152: U2.D20 18.9,8.23 18.9,7.62 17.68,6.4 17.68,6.25 17.3,5.87 15.32,5.87 14.33,6.86 13.11,6.86 10.21,9.75 10.21,9.98 POWER.2
PWR_LEDR
  Top 0.152: R9.1 16,30.63 PWR.C
RESET  (via drill 0.33)
  Top 0.152: R10.1 6.33,12.8 6.33,8.84 10.13,5.03 RESET.2 10.21,4.95 10.21,4.5 v11.05,3.66 | v22.78,3.28 29.95,3.28 31.09,4.42 31.62,4.42 U2.A10 | v21.95,2.44 16.08,2.44 15.09,1.45 14.4,1.45 13.56,2.29 U3.4 13.56,2.21 v12.5,2.21 11.73,2.21 C9.1
  Bottom 0.152: v21.95,2.44 v22.78,3.28 | v12.5,2.21 v11.05,3.66
SERVO_EN  (via drill 0.33)
  Top 0.152: v40.01,24.16 40.01,24.23 40.46,24.69 U2.U3 | v46.25,31.62 45.57,32.31 R23.2
  Bottom 0.152: v40.01,24.16 40.46,24.16 41,23.62 46.71,23.62 48.77,25.68 48.77,29.11 v46.25,31.62
SVO5  (via drill 0.33)
  Top 0.152: v38.79,22.86 39.32,22.86 39.93,23.47 40.46,23.47 U2.T3 | v47.85,32.16 49,32.16 49.45,31.7 49.45,30.94 49.91,30.48 R19.2
  Bottom 0.152: v38.79,22.86 39.24,22.86 41,21.11 46.33,21.11 49.84,24.61 49.84,30.63 48.31,32.16 v47.85,32.16
SVO6  (via drill 0.33)
  Top 0.152: v38.63,23.93 39.01,23.55 39.24,23.55 U2.T4 | v39.55,31.24 39.55,32 R20.2
  Bottom 0.152: v38.63,23.93 38.63,23.55 38.18,23.09 38.18,22.63 40.01,20.8 46.48,20.8 50.14,24.46 50.14,30.79 48.16,32.77 41.07,32.77 v39.55,31.24
SVO7
  Top 0.152: U2.T1 43.13,23.55 45.57,23.55 45.72,23.7 R17.1
SVO8
  Top 0.152: U2.T2 41.83,23.55 42.44,23.55 43.13,24.23 44.81,24.23 45.72,25.15 R18.1
SYS_5V
  Top 0.406: U2.W4 U2.Y4 35.32,32.5 TP1.TP 29.25,29.75 18.05,29.75 16.75,28.45 16.75,24.9 16.7,24.95 R12.1
UART5_RX  (via drill 0.33)
  Top 0.152: v41.22,24.23 41.3,24.23 41.76,24.69 U2.U2 | v48.16,27.89 47.09,28.96 47.09,31.93 R22.2
  Bottom 0.152: v41.22,24.23 46.86,24.23 48.16,25.53 v48.16,27.89
UART5_TX  (via drill 0.33)
  Top 0.152: v45.11,25.98 43.89,24.77 43.13,24.77 U2.U1 | v48.08,28.96 51.28,28.96 R21.2
  Bottom 0.152: v48.08,28.96 v45.11,25.98
USB0_DM
  Top 0.152: U2.N18 22.1,18.89 23.53,18.89 23.53,19.85 23.65,20.15 47.4,20.15 49.4,22.35 USB0.D-
USB0_DP
  Top 0.152: U2.N17 22.75,19.7 | U2.N17 22.75,19.59 | U2.N17 22.35,19.2 23.2,19.2 23.2,20.07 23.5,20.46 47.2,20.46 49.45,23 USB0.D+
USB0_ID  (via drill 0.33)
  Top 0.152: v24.69,21.41 24.23,20.95 24.08,20.95 U2.P16 | v27.05,19.05 30.4,19.05 31.09,18.36 31.09,18.21 31.62,17.68 31.77,17.68 32.38,17.07 32.38,16.92 32.92,16.38 33.07,16.38 33.68,15.77 33.68,15.62 34.06,15.24 v34.98,15.24 | v37.19,15.24 44.96,15.24 51.13,21.41 51.13,23.32 50.83,23.62 50.22,23.62 USB0.ID
  Bottom 0.152: v27.05,19.05 v24.69,21.41 | v37.19,15.24 v34.98,15.24
USB1_DM
  Top 0.152: U2.R18 21.41,22.25 20.88,22.25 20.19,22.94 17.6,22.94 16.92,23.62 4.88,23.62 USB1.D-
USB1_DP
  Top 0.152: USB1.D+ 5.98,22.86 17.24,22.86 18.3,21.73 22.2,21.73 U2.R17
USB1_ID
  Top 0.152: USB1.ID 4.96,22.4 4.95,22.4 5.94,22.55 17.05,22.55 18.1,21.43 22.29,21.43 U2.P17
USB_DC  (via drill 0.33)
  Top 0.33: U2.P15 25.76,20.95 26.44,21.64 26.82,21.64 27.2,22.02 27.2,22.4 27.66,22.86 28.04,22.86 28.5,23.32 28.5,23.7 28.96,24.16 29.34,24.16 29.79,24.61 29.79,24.99 30.25,25.45 30.63,25.45 31.01,25.83 31.01,26.21 31.47,26.67 31.85,26.67 32.31,27.13 32.31,27.96 32.84,28.5 U2.Y9 32.99,28.57 34.14,28.57 U2.Y8 34.21,28.42 34.75,27.89 34.75,27.13 35.2,26.67 35.66,26.67 36.04,26.29 36.04,24.61 36.5,24.16 36.88,24.16 37.34,23.7 37.34,22.02 37.49,21.87 v37.49,21.57 | v39.85,19.2 40.01,19.05 46.33,19.05 48.62,20.09 50.14,21.64 USB0.VBUS
  Bottom 0.33: v37.49,21.57 v39.85,19.2
VDD_1V8
  Top 0.152: U2.D10 31.7,8.31 32.84,9.45 U2.E9 32.92,9.45 33.53,9.45 33.98,8.99 34.37,8.99 34.67,9.3 34.67,10.97 34.14,11.51 28.96,11.51 28.35,12.12 28.35,12.27 27.81,12.8 27.66,12.8 27.05,13.41 27.05,14.78 26.52,15.32 26.36,15.32 25.83,15.85 25.83,16 25.22,16.61 25.07,16.61 24.54,17.14 24.54,17.68 24.27,17.95 | 24.27,17.95 24.23,17.91 21.26,17.91 20.95,18.21 20.95,19.89 21.49,20.42 22.94,20.42 23.47,20.95 23.47,21.64 24,22.17 U2.R16 | 24.27,17.95 24.54,18.21 24.54,18.59 24.08,19.05 24.08,19.66 U2.N16
VDD_3V3AUX  (via drill 0.33)
  Top 0.152: v25.91,29.03 25.98,29.11 29.26,29.11 29.79,28.57 30.33,28.57 U2.Y11 | v22.94,32 21.64,32 20.57,30.94 18.21,30.94 17.07,32.08 17.07,32.31 PWR.A
  Bottom 0.152: v22.94,32 v25.91,29.03
VDD_RTC  (via drill 0.33)
  Top 0.152: v22.17,3.89 24.16,3.89 24.54,4.27 24.54,4.42 25.07,4.95 25.22,4.95 25.83,5.56 25.83,8.23 26.52,8.91 26.52,9.45 U2.E14 | v21.34,3.05 15.54,3.05 14.86,2.36 U3.5
  Bottom 0.152: v21.34,3.05 v22.17,3.89